# Altium PCB AB32VG1_Prougen_Circuit_V02.PcbDoc (part 1 of 3)
Units mm, origin at the board's own origin, x right, y up, seen from the top; angles counter-clockwise.
Board outline 90.13 x 60.13 mm, 4 copper layers (Top Layer, GND, POWER, Bottom Layer); 102 components, 91 nets, 357 pads, 386 vias.
Unrouted connection lines stored in the file: 1.
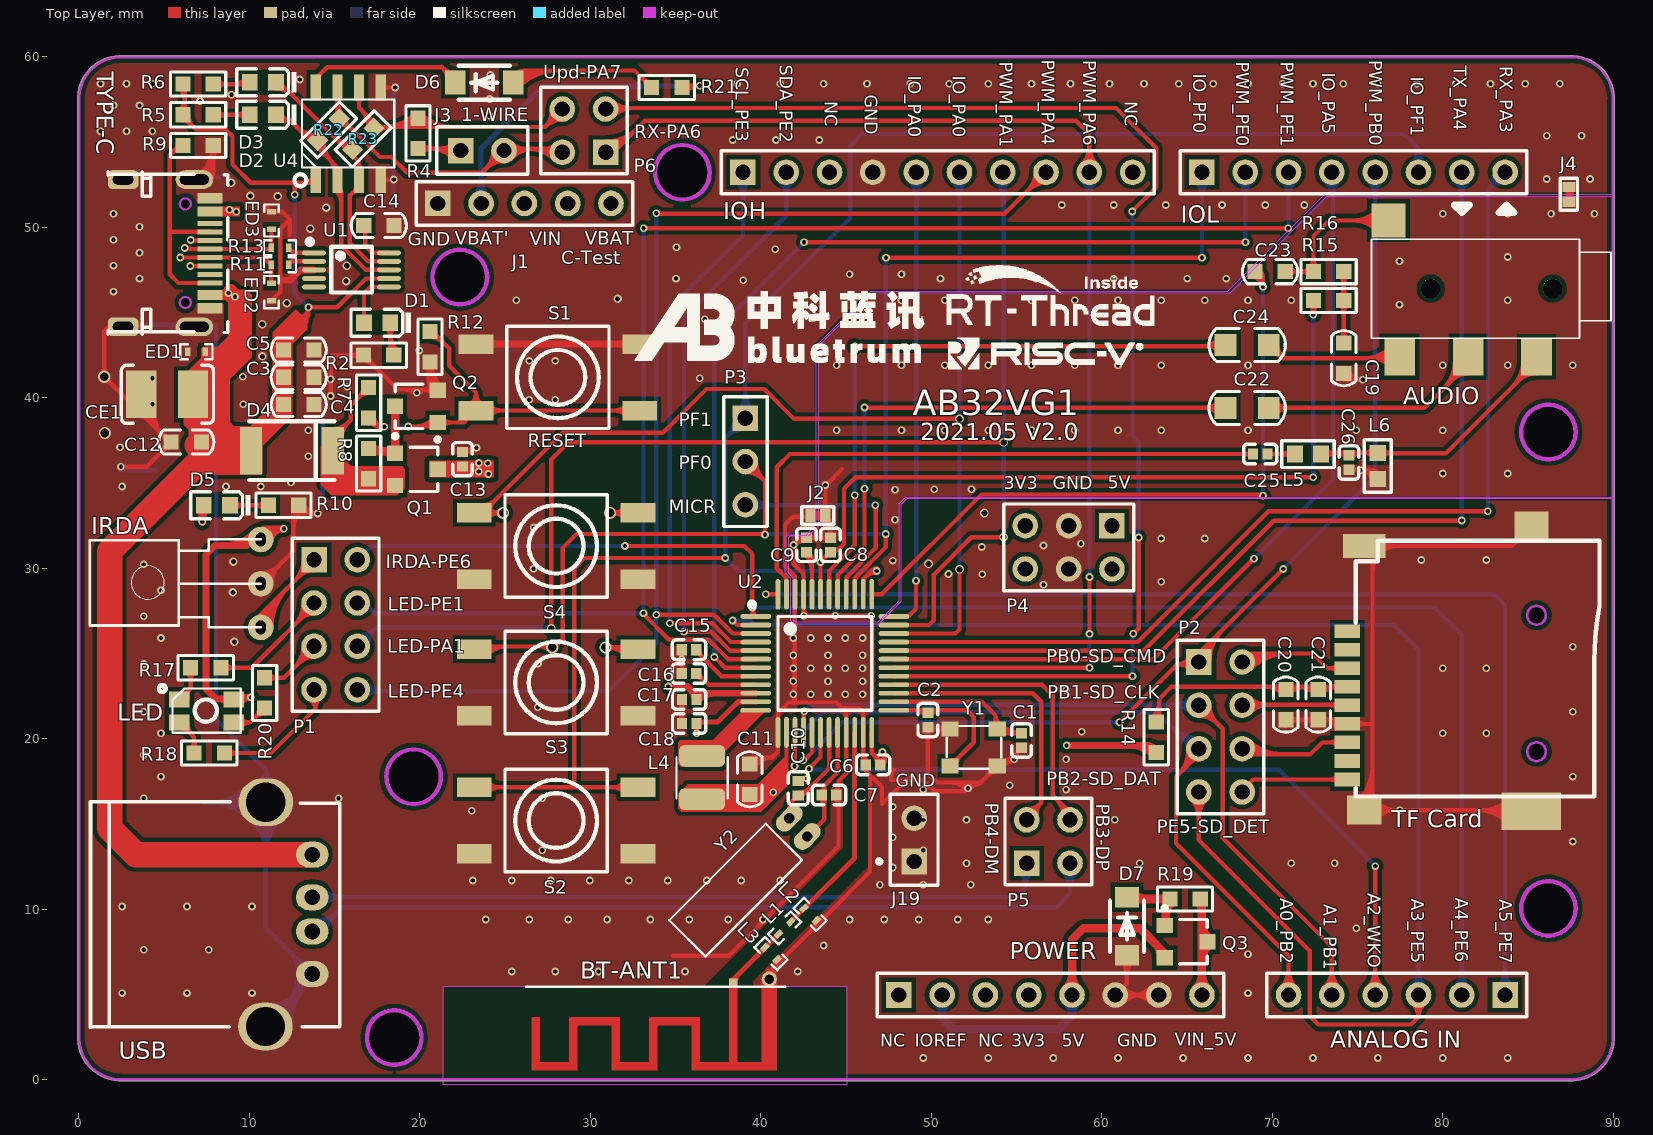
[diagram p0: Top Layer view]
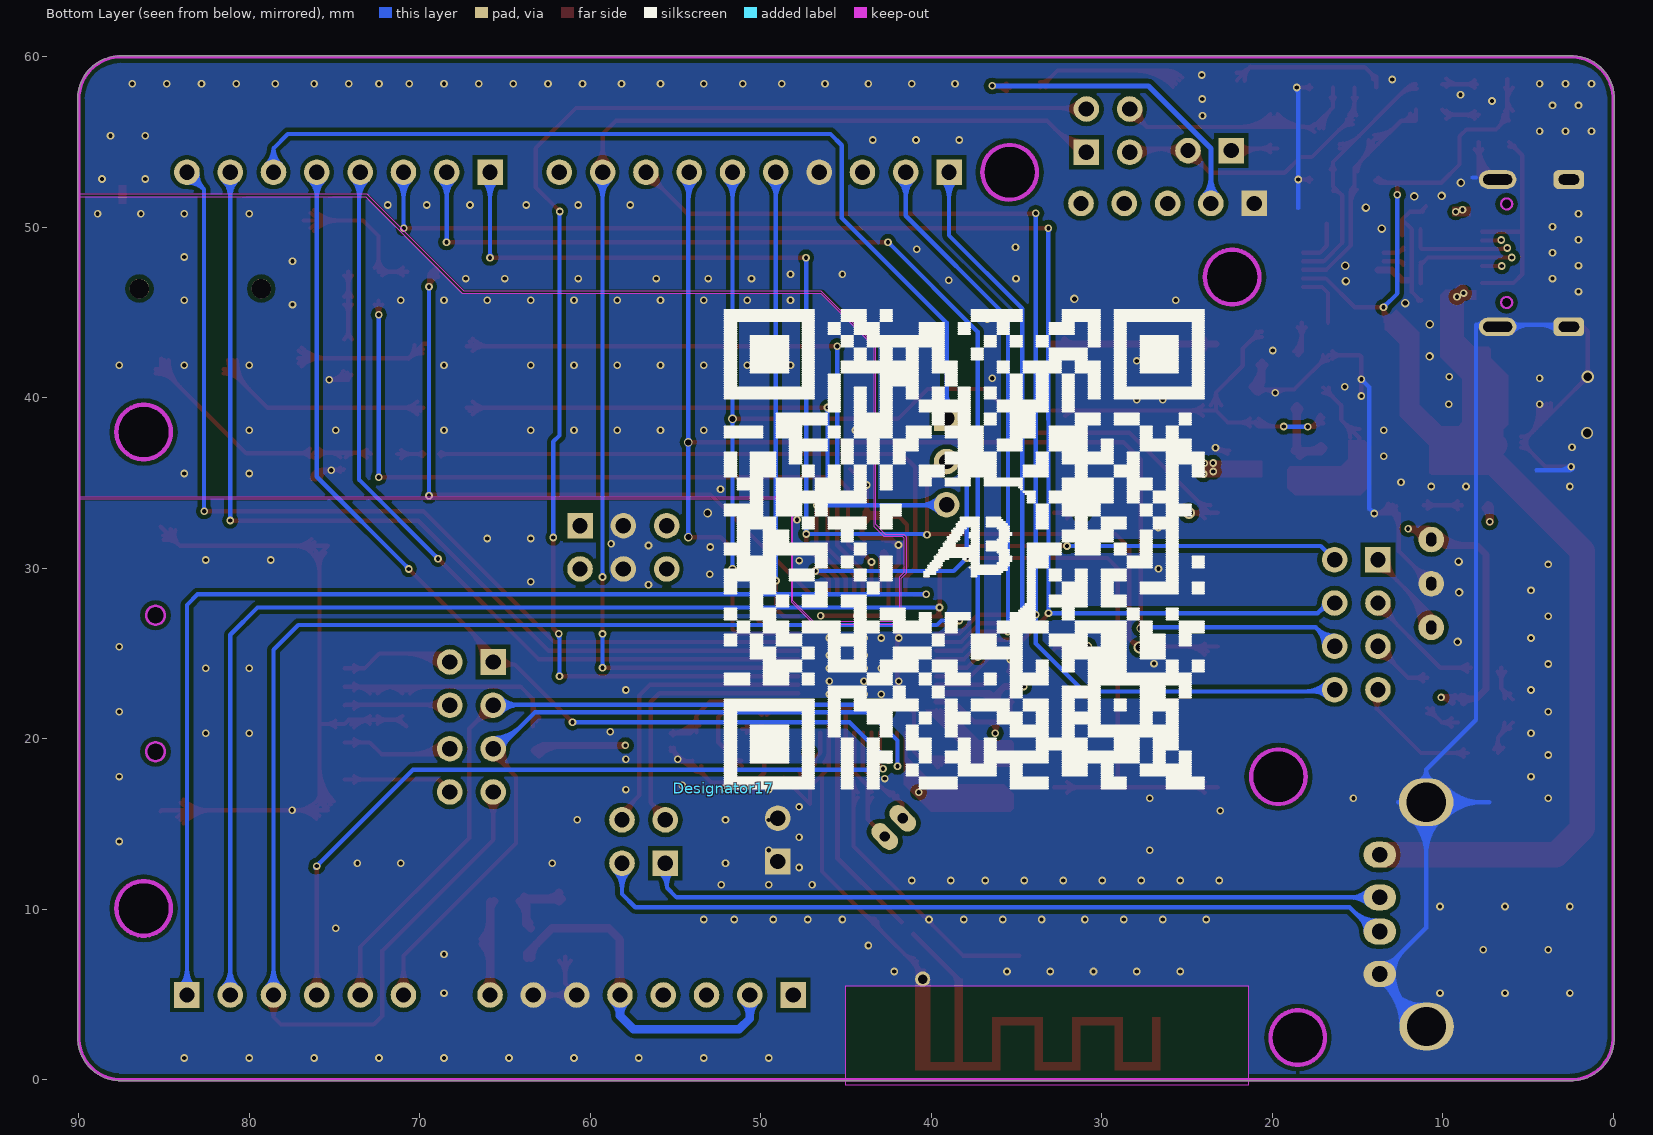
[diagram p1: Bottom Layer view, seen from below]
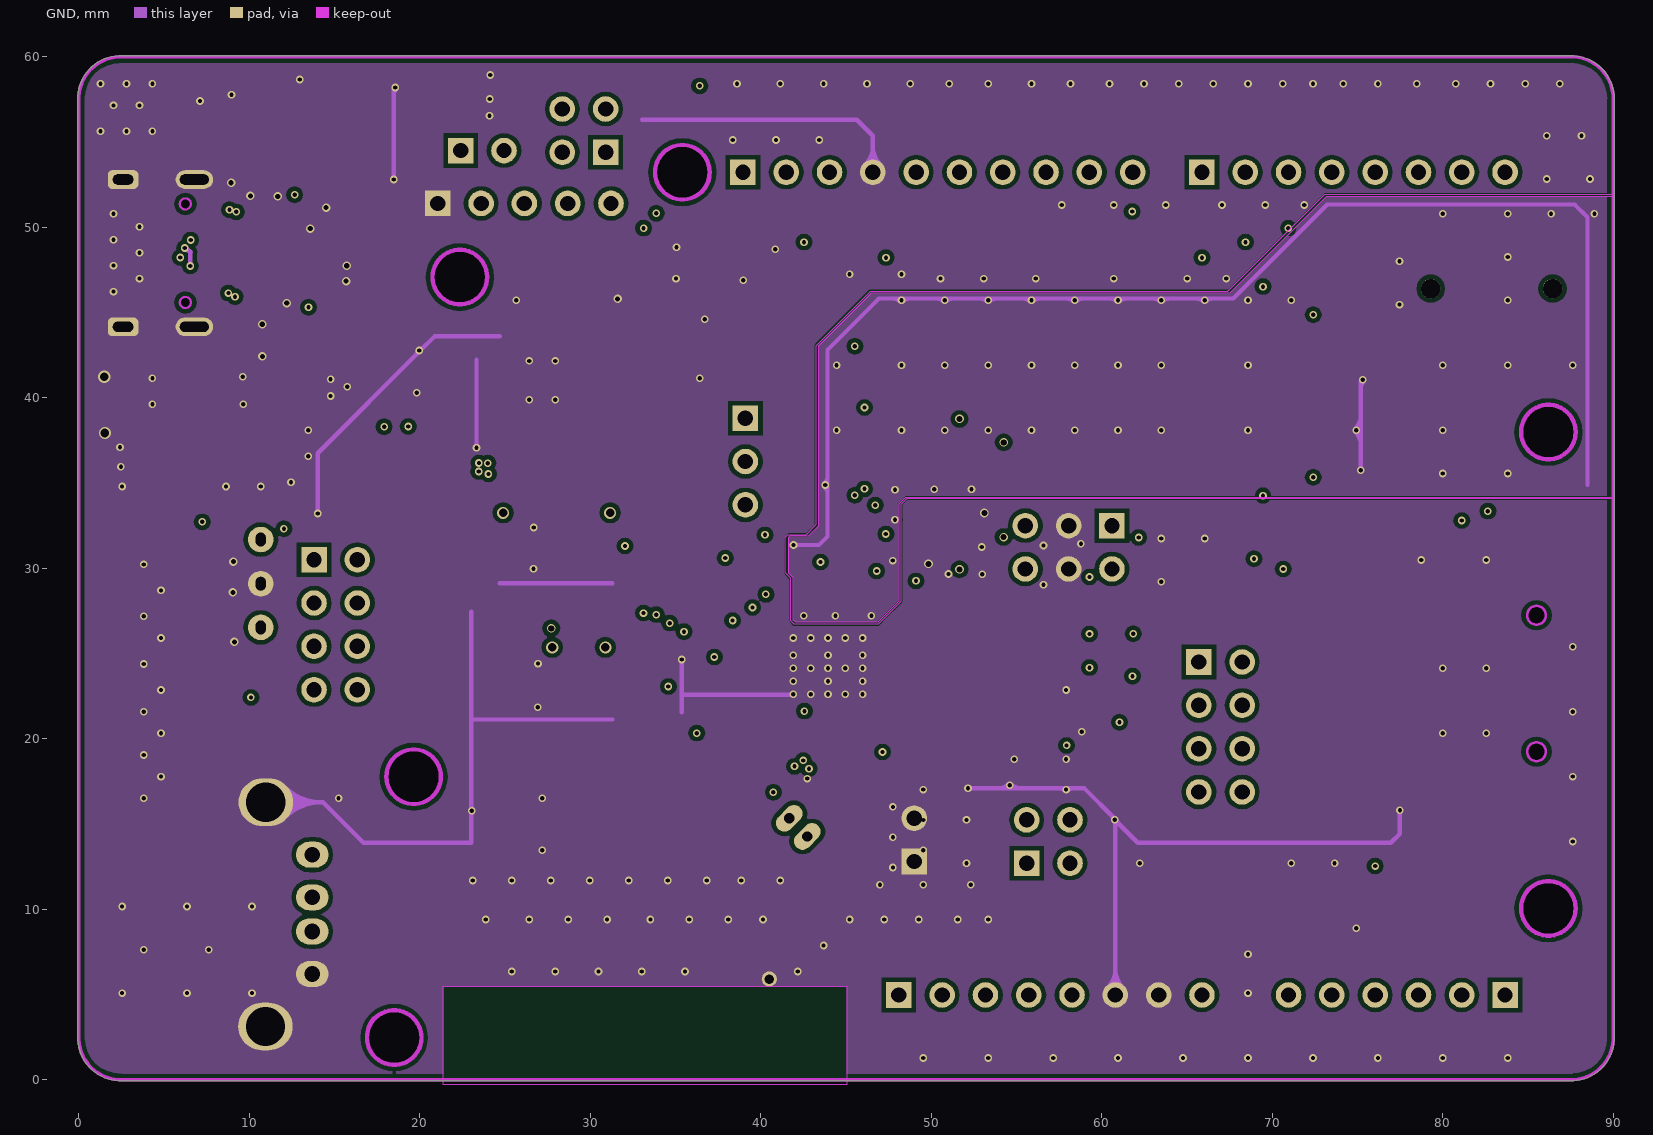
[diagram p2: GND]
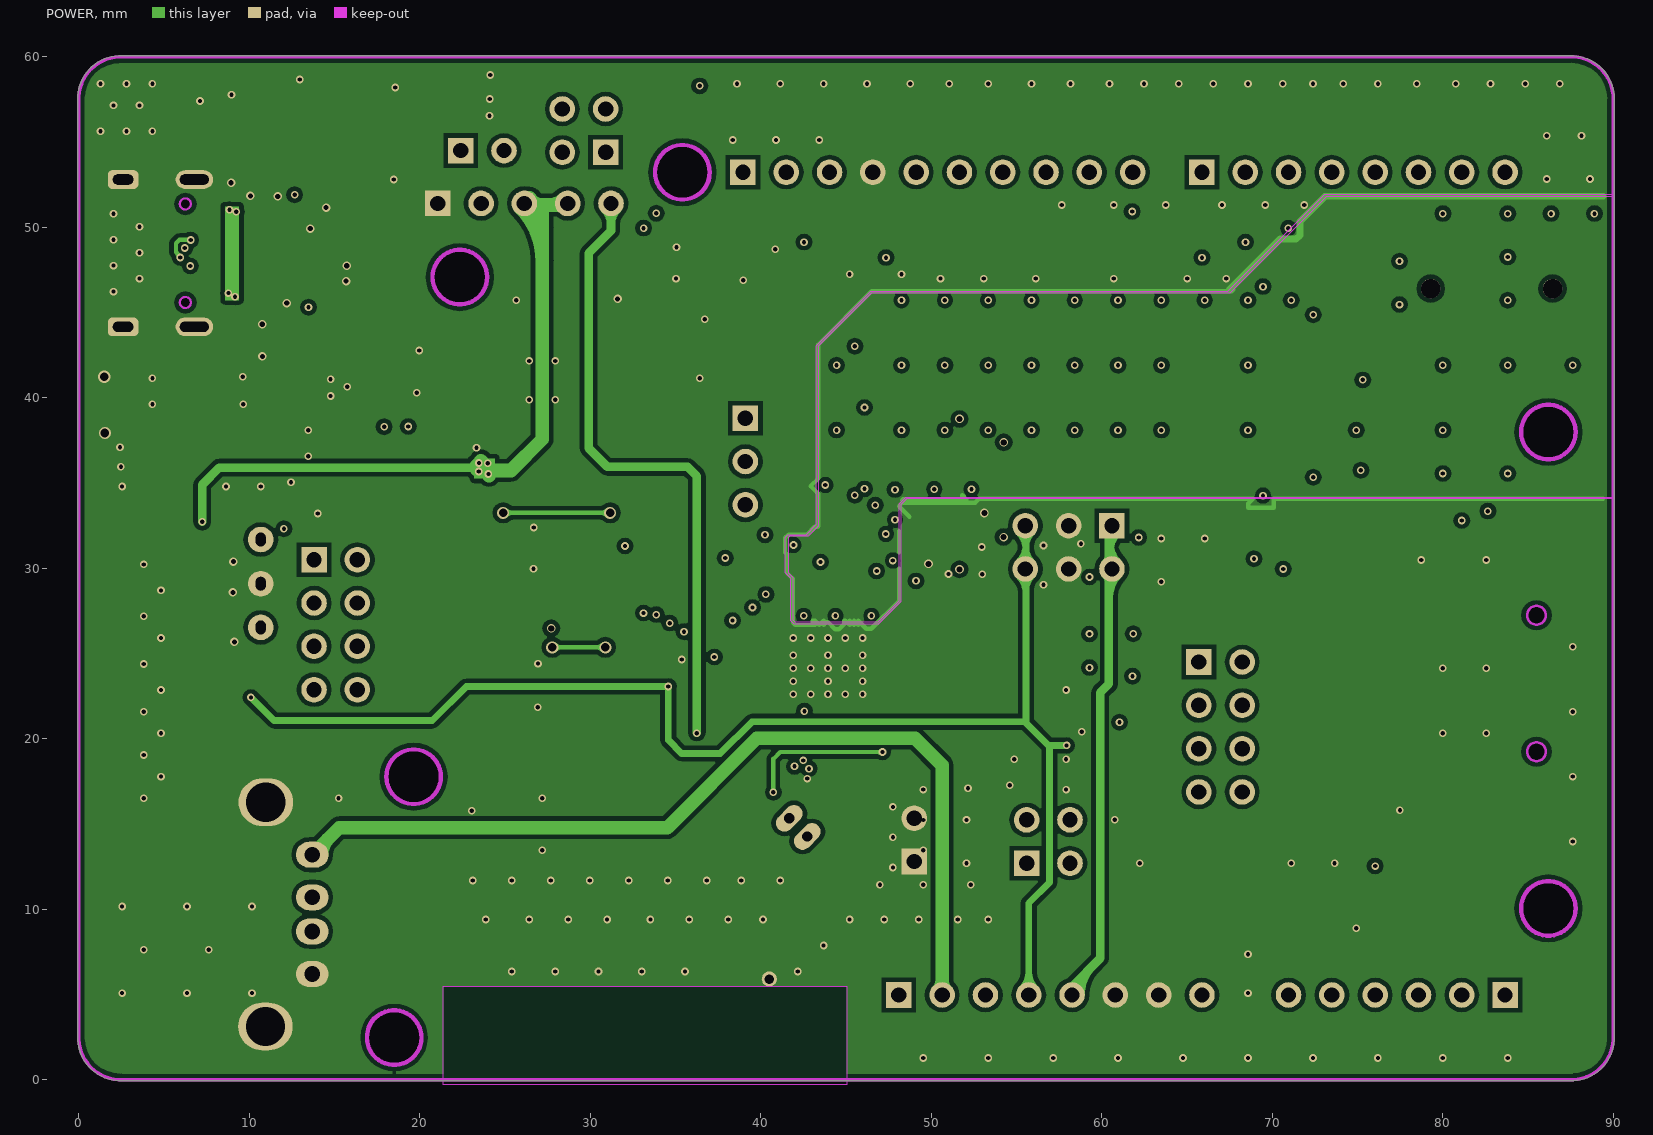
[diagram p3: POWER]

## Layer stack, top to bottom
Top Layer: signal copper 0.0356
Dielectric: core 0.32, FR-4, Dk 4.8
GND: signal copper 0.0356
Dielectric: prepreg 0.32, FR-4, Dk 4.8
POWER: signal copper 0.0356
Dielectric: core 0.32, FR-4, Dk 4.8
Bottom Layer: signal copper 0.0356

## Board outline
-0.064,2.357 cw(c0,2.36) -0.064,2.36 -0.064,57.668 cw(c0,57.668) -0.064,57.672 cw(c2.464,57.536) 2.356,60.064 cw(c2.359,60.001) 2.368,60.064 cw(c2.37,60) 2.37,60.064 87.429,60.064 cw(c87.535,57.535) 90.066,57.535 cw(c87.535,57.535) 90.066,57.499 cw(c90.002,57.5) 90.064,57.484 90.064,2.36 cw(c90,2.36) 90.064,2.355 cw(c90,2.349) 90.064,2.349 cw(c90,2.349) 90.064,2.346 cw(c87.536,2.464) 87.663,-0.064 cw(c87.66,0) 87.66,-0.064 2.571,-0.064 cw(c2.465,2.465)
cut-out: 5.923,45.586 cw(c6.244,45.586) 6.244,45.907 6.246,45.907 cw(c6.246,45.581) 6.572,45.581 6.572,45.58 cw(c6.244,45.58) 6.244,45.252 cw(c6.244,45.573) 5.923,45.573
cut-out: 5.926,51.375 cw(c6.247,51.375) 6.247,51.696 6.249,51.696 cw(c6.249,51.37) 6.575,51.37 6.575,51.369 cw(c6.247,51.369) 6.247,51.041 cw(c6.247,51.362) 5.926,51.362
cut-out: 84.947,19.245 cw(c85.495,19.245) 85.495,19.793 85.504,19.793 cw(c85.504,19.25) 86.047,19.25 86.047,19.235 cw(c85.499,19.235) 85.499,18.687 cw(c85.499,19.239) 84.947,19.239
cut-out: 84.95,27.241 cw(c85.498,27.241) 85.498,27.789 85.507,27.789 cw(c85.507,27.246) 86.05,27.246 86.05,27.231 cw(c85.502,27.231) 85.502,26.683 cw(c85.502,27.235) 84.95,27.235
cut-out: 21.253,17.721 cw(c19.653,17.721) 19.653,16.121 cw(c19.653,17.772) 18.002,17.772 18.002,17.899 cw(c19.526,17.899) 19.526,19.423 19.653,19.423 cw(c19.653,17.823) 21.253,17.823
cut-out: 87.8,37.939 cw(c86.2,37.939) 86.2,36.339 cw(c86.2,37.99) 84.549,37.99 84.549,38.117 cw(c86.073,38.117) 86.073,39.641 86.2,39.641 cw(c86.2,38.041) 87.8,38.041
cut-out: 87.8,9.999 cw(c86.2,9.999) 86.2,8.399 cw(c86.2,10.05) 84.549,10.05 84.549,10.177 cw(c86.073,10.177) 86.073,11.701 86.2,11.701 cw(c86.2,10.101) 87.8,10.101
cut-out: 37.08,53.139 cw(c35.48,53.139) 35.48,51.539 cw(c35.48,53.19) 33.829,53.19 33.829,53.317 cw(c35.353,53.317) 35.353,54.841 35.48,54.841 cw(c35.48,53.241) 37.08,53.241
cut-out: 24.02,47.019 cw(c22.42,47.019) 22.42,45.419 cw(c22.42,47.07) 20.769,47.07 20.769,47.197 cw(c22.293,47.197) 22.293,48.721 22.42,48.721 cw(c22.42,47.121) 24.02,47.121
cut-out: 20.09,2.429 cw(c18.49,2.429) 18.49,0.829 cw(c18.49,2.48) 16.839,2.48 16.839,2.607 cw(c18.363,2.607) 18.363,4.131 18.49,4.131 cw(c18.49,2.531) 20.09,2.531

## Design rules (kind name [scope] priority, off if disabled: settings)
Clearance Clearance_1 [All vs InPolygon] p1: gap=0.254
Clearance [All] p2: gap=0.127
PolygonConnect [All] p1: connectstyle=Direct reliefconductorwidth=0.254 reliefentries=4 polygonreliefangle="90 Angle"
RoutingVias [All] p1: holewidth=0.711 width=1.27 viastyle="Through Hole" minholewidth=0.711 minwidth=1.27 maxholewidth=0.711 maxwidth=1.27
SilkscreenOverComponentPads [All] p1: minsilkscreentomaskgap=0.254
SolderMaskExpansion [All] p1: expansion=0.102
Width [All] p1: maxlimit=2 minlimit=0.127 preferedwidth=0.254
27 further rules are at their usual default settings.

## Components (designator, comment, footprint, x,y, rotation, side; value= is the part's Value field where it differs from the comment)
"ANALOG IN" "Header 6" HDR1X6 83.66,4.97 r180 top
AUDIO "LINE-OUT" LINER_09 85.5,42.4 r0 top (schematic designator J13)
BT-ANT1 "ANTENNA_MIFA" TI_MIFA 38.4,5.7 r180 top
C1 "NC" C0402 55.3,19.9 r90 top
C2 "NC" C0402 49.8,21.1 r90 top
C3 "106" C0603 12.9,41.2 r0 top
C4 "106" C0603 12.9,39.6 r0 top
C5 "104" C0603 12.9,42.8 r0 top
C6 "105" C0402 46.59,18.47 r0 top
C7 "NC" C0402 44,16.7 r0 top
C8 "105" C0402 44.09,31.37 r90 top
C9 "105" C0402 42.69,31.37 r90 top
C10 "NC" C0402 42.2,17.1 r90 top
C11 "10uF" C0603 39.36,17.62 r270 top
C12 "104" C0603 6.3,37.4 r180 top
C13 "105" C0402 22.5,36.4 r90 top
C14 "104" C0603 17.6,50.1 r0 top
C15 "105" C0402 35.79,25.22 r180 top
C16 "105" C0402 35.79,23.82 r180 top
C17 "105" C0402 35.8,22.3 r180 top
C18 "105" C0402 35.8,20.9 r180 top
C19 "10uF" C0603 74.2,42.32 r90 top
C20 "10uF" C0603 70.8,22 r90 top
C21 "104" C0603 72.7,22 r90 top
C22 "22uF/10V" C0805 68.53,39.4 r0 top
C23 "104" C0603 69.875,47.4 r0 top
C24 "22uF/10V" C0805 68.53,43.1 r0 top
C25 "102" C0402 69.3,36.7 r0 top
C26 "NC" C0402 74.5,36.2 r270 top
CE1 "D47uF/16V" C1210 6.7,40.2 r180 top
D1 "RED" 0603_LED_S1 17.5,44.4 r180 top
D2 "BLUE" 0603_LED_S1 10.8,56.6 r180 top
D3 "BLUE" 0603_LED_S1 10.8,58.5 r180 top
D4 "M7" DO-213AB 12.5,36.9 r180 top
D5 "RED" 0603_LED_S1 8.1,33.7 r180 top
D6 "4148" SOD123 23.9,58.5 r0 top
D7 "5.1V" SOD123 61.5,8.89 r270 top
Designator17 "Comment" 二维码 52.16,17.09 r180 bottom
ED1 "NC" r0402 6.9,42.7 r180 top
ED2 "NC" r0402 11.3,46.2 r270 top
ED3 "NC" r0402 11.3,50.4 r90 top
IOH "Header 10" HDR1X10 38.956,53.23 r0 top
IOL "Header 8" HDR1X8 65.88,53.23 r0 top
IRDA "IR" IC_REM_DIP 10.673,26.532 r90 top (schematic designator IR1)
J1 "UART" HDR1X5 21.057,51.4 r0 top
J2 "JUMP" JUMP 43.78,33.1 r180 top
J3 "JUMP" PIN2 22.4,54.5 r0 top
J4 "JUMP" JUMP 87.4,51.5 r90 top
J19 "JUMP" PIN2 49,12.8 r90 top
L1 "NC" L0402 41.4,8.9 r225 top
L2 "NC" R0402 42.9,9.7 r135 top
L3 "NC" R0402 40.6,7.4 r315 top
L4 "10uH" CD32 36.56,17.72 r270 top
L5 "220nH" L0603 72.1,36.7 r0 top
L6 "100nH" L0603 76.2,36 r270 top
LED "LED-3528-美华" LED-3528-美华 9.1,20.95 r180 top (schematic designator LED1)
P1 "Header 4X2" HDR2X4 13.8,30.5 r270 top
P2 "Header 4X2" HDR2X4 65.7,24.5 r270 top
P3 "Header 3" HDR1X3 39.1,38.8 r270 top
P4 "Header 3X2" HDR2X3 60.6,32.5 r180 top
P5 "Header 2X2" HDR2X2 55.6,12.7 r0 top
P6 "Header 2X2" HDR2X2 30.9,54.4 r90 top
POWER "Header 8" HDR1X8 48.1,4.97 r0 top
Q1 "ATS03" SOT-23 19.8,35.8 r270 top
Q2 "SS8050" SOT-23 19.8,39.5 r90 top
Q3 "SS8050" SOT-23 64.95,8.1 r270 top
R2 "6.8K" R0603 16.7,42.5 r0 top
R4 "200R" R0603 19.9,56.4 r270 top
R5 "3K" R0603 7.89,56.6 r180 top
R6 "3K" R0603 7.89,58.4 r180 top
R7 "1K" R0603 17,40.6 r270 top
R8 "470K" R0603 17,35.25 r90 top
R9 "5.1K" R0603 7.89,54.8 r180 top
R10 "6.8K" R0603 12.9,33.7 r180 top
R11 "0ohm" r0402 11.8,47.8 r0 top
R12 "10K" R0603 20.6,42.1 r90 top
R13 "0ohm" r0402 11.8,48.8 r0 top
R14 "0R" R0603 63.2,19.2 r90 top
R15 "2.2K" R0603 74.2,45.7 r180 top
R16 "2.2K" R0603 74.2,47.4 r180 top
R17 "470R" R0603 8.34,24.16 r180 top
R18 "240R" R0603 8.54,19.16 r180 top
R19 "1K" R0603 64,10.6 r0 top
R20 "240R" R0603 10.9,23.578 r270 top
R21 "0ohm" R0603 33.6,58.2 r0 top
R22 "200R" R0603 14.02,55.096 r45 top (schematic designator R4)
R23 "200R" R0603 16.055,54.561 r45 top (schematic designator R4)
S1 "RESET" SMT_6*6*5按键 28.1,41.2 r0 top
S2 "KEY1" SMT_6*6*5按键 28,15.2 r0 top
S3 "KEY2" SMT_6*6*5按键 28,23.3 r0 top
S4 "KEY3" SMT_6*6*5按键 28,31.3 r0 top
"TF Card" "TF3" TF3 74.4,26.3 r90 top (schematic designator SD-1)
TYPE-C "USB_TYPEC_母座" TYPE-C-DIP 2.6,48.48 r270 top
U1 "CH340E" MSOP-10 16,47.5 r270 top
U2 "AB32VG1" LQFP-48_7x7x05P 43.76,24.42 r270 top
U4 "PAI121M31" PAI121M31 13.9,52.8 r90 top
USB "USB-A-M" USB-A 13.7,13.2 r0 top (schematic designator J14)
Y1 "26MHz" "XTAL_SMT - 3225" 52.5,19.5 r180 top
Y2 "32.768K" XTAL-3X8 42.2,14.8 r225 top
? "Comment" LOGO-RISC-V-2 51,41.7 r0 top
? "Comment" LOGO-RT-THREAD-4 50.9,44.3 r0 top
? "Comment" LOGO-18*6 32.6,42.2 r0 top

## Footprints (in the part's own frame and the unit in brackets; to place one, negate y for a bottom-side part, rotate by r counter-clockwise, add the part's x,y. Pads: shape width x height; smd on the part's side, far side on the other; paste and mask are expansions set on the pad)
0603_LED_S1 [mm]
  rect 0.93x0.98 smd: A(0.77,0) K(-0.77,0)
  silkscreen extent -1.98,-0.79 1.54,0.79, body extent -0.8,-0.4 0.8,0.4, height 0.6
C0402 [mm]
  rect 0.6x0.65 smd mask+0.051: 1(-0.425,0) 2(0.425,0)
  silkscreen extent -0.98,-0.58 0.98,0.58, body extent -0.48,-0.3 0.52,0.3, height 0.2
C0603 [mil]
  rect 35x35 smd: 1(-35,0) 2(35,0)
  silkscreen extent -64,-28 64,28
C0805 [mm]
  rect 1.27x1.27 smd: 1(-1.27,0) 2(1.27,0)
  silkscreen extent -2.24,-0.97 2.24,0.97
C1210 [mil]
  rect 70x110 smd: 1(0,0) 2(119.48,0)
  silkscreen extent -47,-67 165,67
CD32 [mm]
  rrect50% 1.27x2.7 smd: 1(-1.27,0) 2(1.27,0)
  silkscreen extent -1.2,-1.5 1.2,1.5
DO-213AB [mm]
  rect 1.3x2.8 smd: 1(2.4,0) 2(-2.4,0)
  silkscreen extent -2.5,-1.72 2.5,1.72
HDR1X3 [mm] "Connector; Header; 3 Position"
  rect 1.5x1.5 hole 0.9: 1(0,0)
  round 1.5 hole 0.9: 2(2.54,0) 3(5.08,0)
  silkscreen extent -1.27,-1.27 6.35,1.27
HDR1X5 [mm] "Connector; Header; 5 Position"
  rect 1.5x1.5 hole 0.9: 1(0,0)
  round 1.5 hole 0.9: 2(2.54,0) 3(5.08,0) 4(7.62,0) 5(10.16,0)
  silkscreen extent -1.27,-1.27 11.43,1.27
HDR1X6 [mm] "Connector; Header; 6 Position"
  rect 1.5x1.5 hole 0.9: 1(0,0)
  round 1.5 hole 0.9: 2(2.54,0) 3(5.08,0) 4(7.62,0) 5(10.16,0) 6(12.7,0)
  silkscreen extent -1.27,-1.27 13.97,1.27
HDR1X8 [mm] "Connector; Header; 8 Position"
  rect 1.5x1.5 hole 0.9: 1(0,0)
  round 1.5 hole 0.9: 2(2.54,0) 3(5.08,0) 4(7.62,0) 5(10.16,0) 6(12.7,0) 7(15.24,0) 8(17.78,0)
  silkscreen extent -1.27,-1.27 19.05,1.27
HDR1X10 [mm] "Connector; Header; 10 Position"
  rect 1.5x1.5 hole 0.9: 1(0,0)
  round 1.5 hole 0.9: 2(2.54,0) 3(5.08,0) 4(7.62,0) 5(10.16,0) 6(12.7,0) 7(15.24,0) 8(17.78,0) 9(20.32,0) 10(22.86,0)
  silkscreen extent -1.27,-1.27 24.13,1.27
HDR2X2 [mm] "Connector; Header; 2x2 Position"
  rect 1.5x1.5 hole 0.9: 1(0,0)
  round 1.5 hole 0.9: 2(0,2.54) 3(2.54,0) 4(2.54,2.54)
  silkscreen extent -1.27,-1.27 3.81,3.81
HDR2X3 [mm] "Connector; Header; 3x2 Position"
  rect 1.5x1.5 hole 0.9: 1(0,0)
  round 1.5 hole 0.9: 2(0,2.54) 3(2.54,0) 4(2.54,2.54) 5(5.08,0) 6(5.08,2.54)
  silkscreen extent -1.27,-1.27 6.35,3.81
HDR2X4 [mm] "Connector; Header; 4x2 Position"
  rect 1.5x1.5 hole 0.9: 1(0,0)
  round 1.5 hole 0.9: 2(0,2.54) 3(2.54,0) 4(2.54,2.54) 5(5.08,0) 6(5.08,2.54) 7(7.62,0) 8(7.62,2.54)
  silkscreen extent -1.27,-1.27 8.89,3.81
IC_REM_DIP [mm]
  round 1.5 hole 0.6 slot 0.8 at 0 deg: 1(0,0) 2(2.562,0) 3(5.152,0)
  silkscreen extent 0,0 5.16,10.02
JUMP [mm]
  rect 0.6x0.762 smd: 1(0,0) 2(0.86,0)
  silkscreen extent -0.51,-0.51 1.37,0.51
L0402 [mil]
  rect 20x13 smd: 1(-20,0) 2(20,0)
  silkscreen extent -37,-17 37,17, body extent -20,-10 20,10, height 10
L0603 [mm]
  rect 0.93x0.98 smd: 1(-0.77,0) 2(0.77,0)
  silkscreen extent -1.53,-0.79 1.54,0.79, body extent -0.82,-0.41 0.82,0.41, height 0.46
LED-3528-美华 [mm]
  rect 1.2x0.95 smd: 1(0,-1.35) 2(0,0) 3(3.2,0) 4(3.2,-1.35)
  silkscreen extent -0.4,-2.2 4.4,0.6
LINER_09 [mm]
  rect 1.8x2.2 smd: 1(0,0) 2(-4,0) 3(-8.025,0)
  rect 2x2 smd: 4(-8.675,8)
  round 1.143 hole 1.143: 5(-6.2,4) 6(0.95,4)
  silkscreen extent -9.68,1.1 4.37,6.9
LOGO-18*6 [mm]
  silkscreen extent 0,-0.12 16.98,4.06
LOGO-RISC-V-2 [mm]
  silkscreen extent 0,0.01 11.43,1.82
LOGO-RT-THREAD-4 [mm]
  silkscreen extent 0,-0.04 12.17,3.48
LQFP-48_7x7x05P [mm]
  oval 0.28x1.8 smd: 1(-2.75,-4.05) 2(-2.25,-4.05) 3(-1.75,-4.05) 4(-1.25,-4.05) 5(-0.75,-4.05) 6(-0.25,-4.05) 7(0.25,-4.05) 8(0.75,-4.05) 9(1.25,-4.05) 10(1.75,-4.05) 11(2.25,-4.05) 12(2.75,-4.05) 25(2.75,4.05) 26(2.25,4.05) 27(1.75,4.05) 28(1.25,4.05) 29(0.75,4.05) 30(0.25,4.05) 31(-0.25,4.05) 32(-0.75,4.05) 33(-1.25,4.05) 34(-1.75,4.05) 35(-2.25,4.05) 36(-2.75,4.05)
  oval 1.8x0.28 smd: 13(4.05,-2.75) 14(4.05,-2.25) 15(4.05,-1.75) 16(4.05,-1.25) 17(4.05,-0.75) 18(4.05,-0.25) 19(4.05,0.25) 20(4.05,0.75) 21(4.05,1.25) 22(4.05,1.75) 23(4.05,2.25) 24(4.05,2.75) 37(-4.05,2.75) 38(-4.05,2.25) 39(-4.05,1.75) 40(-4.05,1.25) 41(-4.05,0.75) 42(-4.05,0.25) 43(-4.05,-0.25) 44(-4.05,-0.75) 45(-4.05,-1.25) 46(-4.05,-1.75) 47(-4.05,-2.25) 48(-4.05,-2.75)
  silkscreen extent -3.6,-4.42 2.75,2.75
MSOP-10 [mm]
  oval 0.28x1.4 smd mask+0.051: 1(-1,-2.2) 2(-0.5,-2.2) 3(0,-2.2) 4(0.5,-2.2) 5(1,-2.2) 6(1,2.2) 7(0.5,2.2) 8(0,2.2) 9(-0.5,2.2) 10(-1,2.2)
  silkscreen extent -1.8,-2.6 1.33,1.2
PAI121M31 [mm]
  rect 1.55x0.6 smd: 1(0,0) 2(0,-1.27) 3(0,-2.54) 4(0,-3.81) 5(5.4,-3.81) 6(5.4,-2.54) 7(5.4,-1.27) 8(5.4,0)
  silkscreen extent -0.39,-4.6 4.7,1.25
PIN2 [mm] "Photosensitive Diode; 2 Leads"
  rect 1.5x1.5 hole 0.9: 1(0,0)
  round 1.5 hole 0.9: 2(2.54,0)
  silkscreen extent -1.4,-1.4 3.94,1.4
r0402 [mil]
  rect 13x20 smd: 1(-20,0) 2(20,0)
  silkscreen extent -37,-17 37,17
R0402 [mil]
  rect 13x20 smd: 1(-20,0) 2(20,0)
  silkscreen extent -37,-17 37,17
R0603 [mil]
  rect 35x35 smd: 1(0,0) 2(70,0)
  silkscreen extent -29,-28 99,28
SMT_6*6*5按键 [mil]
  rect 80x45 smd: 1(-188.97,76.78) 1(188.97,76.78) 2(-188.97,-76.78) 2(188.97,-76.78)
  silkscreen extent -118,-118 118,118
SOD123 [mm]
  rect 1.2x1.4 smd: 1(-1.815,-0.016) 2(1.585,-0.016)
  silkscreen extent -1.62,-1.02 1.38,0.98
SOT-23 [mm] "SOT-23; 3 Leads; Body 3.0 x 2.6 mm, inc. leads (LxW max)"
  rect 0.9x0.95 smd: 1(-0.95,-1.25) 2(0.95,-1.25) 3(0,1.25)
  silkscreen extent -2.07,-1.37 1.3,1.25
TF3 [mm]
  rect 0.8x1.5 smd: 1(0,0) 2(-1.086,0) 3(-2.172,0) 4(-3.258,0) 5(-4.344,0) 6(-5.43,0) 7(-6.516,0) 8(-7.602,0) 9(-8.688,0)
  rect 2.2x3.5 smd: 10(-10.559,-10.8)
  rect 1.7x2 smd: 10(-10.488,-1)
  rect 1.4x2.5 smd: 10(5.012,-1)
  rect 1.8x2 smd: 10(6.141,-10.8)
  Keep-Out Layer lines w0.15: -7.059,-10.55 ccw(c-7.059,-11.1) -7.059,-11.65 ccw(c-7.059,-11.1) -7.059,-10.55 ; 0.941,-10.55 ccw(c0.941,-11.1) 0.941,-11.65 ccw(c0.941,-11.1) 0.941,-10.55
  silkscreen extent -9.69,-14.8 5.31,-0.5
TI_MIFA [mm]
  rect 0.5x0.5 smd: 1(0,0)
  round 0.889 hole 0.559: 2(-2.101,-0.205)
  Top Layer region: -2.551,4.65 2.449,4.65 2.449,5.15 -2.551,5.15
  Top Layer region: 1.95,2.01 2.45,2.01 2.45,4.65 1.95,4.65
  Top Layer region: 2.45,2.01 4.45,2.01 4.45,2.51 2.45,2.51
  Top Layer region: 4.95,4.65 4.45,4.65 4.45,2.01 4.95,2.01
  Top Layer region: 4.449,4.65 7.149,4.65 7.149,5.15 4.449,5.15
  Top Layer region: 7.15,4.65 6.65,4.65 6.65,2.01 7.15,2.01
  Top Layer region: 7.15,2.01 9.15,2.01 9.15,2.51 7.15,2.51
  Top Layer region: 9.65,4.65 9.15,4.65 9.15,2.01 9.65,2.01
  Top Layer region: 9.149,4.65 11.849,4.65 11.849,5.15 9.149,5.15
  Top Layer region: 11.85,4.65 11.35,4.65 11.35,2.01 11.85,2.01
  Top Layer region: -0.25,-0.25 0.25,-0.25 0.25,4.65 -0.25,4.65
  Top Layer region: -2.55,-0.25 -1.65,-0.25 -1.65,4.65 -2.55,4.65
  silkscreen extent -3.05,0.25 12.15,0.25
TYPE-C-DIP [mm]
  rect 0.3x1.45 smd: A1(-3.375,5.095) A4(-2.6,5.095) A5(-1.25,5.095) A6(-0.25,5.095) A7(0.25,5.095) A8(1.25,5.095) A9(2.6,5.095) A12(3.375,5.095) B1(3.075,5.095) B4(2.3,5.095) B5(1.75,5.095) B6(0.75,5.095) B7(-0.75,5.095) B8(-1.75,5.095) B9(-2.3,5.095) B12(-3.075,5.095)
  oval 1.1x2.2 hole 0.6 slot 1.7 at 90 deg: GND(-4.32,4.18) GND(4.32,4.18)
  rrect50% 1.1x1.8 hole 0.6 slot 1.2 at 90 deg: GND(-4.32,0) GND(4.32,0)
  Keep-Out Layer circle w0.127: c-2.89,3.65 r0.325
  Keep-Out Layer circle w0.127: c2.89,3.65 r0.325
  silkscreen extent -4.79,-0.89 4.75,6.14, body extent -4.64,-2.64 4.64,5.72, height 3.16
USB-A [mm]
  oval 1.905x1.524 hole 0.92: 1(-0.006,-0.002) 2(-0.006,-2.502) 3(-0.006,-4.502) 4(-0.006,-7.002)
  oval 3.2x2.8 hole 2.3: 5(-2.731,3.073) 6(-2.756,-10.077)
  silkscreen extent -13.01,-10.1 1.62,3.11
XTAL-3X8 [mm]
  oval 1.8x1.016 hole 0.6: 1(0,-0.75) 2(0,0.75)
  silkscreen extent 1.2,-1.5 9.2,1.5
"XTAL_SMT - 3225" [mm] "3.2 x 2.5 mm SMT Crystal, 4 pads"
  rect 1x0.9 smd: 1(-1.372,-1.073) 2(1.397,-1.073) 3(1.397,1.098) 4(-1.372,1.098)
  silkscreen extent -1.6,-1.25 1.6,1.25
二维码 [mm]
  silkscreen extent 0.04,0 28.15,28.07

## Part data
"ANALOG IN": "Header, 6-Pin"
AUDIO: library part PHONEJACK2
BT-ANT1: library part ANTENNA_PIFA
C1 C2 C3 C4 C5 C6 C7 C8 C9 C10 C11 C13 C14 C15 C16 C17 C18 C19 C20 C21 C23 C25 C26: library part CAP, "Capacitor"
C12: library part "CAP NP_Dup1", "cap,1.00uF,+/-10%,10V,X5R,C0402"
C22 C24: library part ELECTRO1, "Electrolytic Capacitor"
CE1: library part "CAP POL_Dup1"
D1 D2 D3 D5: library part LED
D4 D6: library part DIODE, "Diode"
D7: library part Zener
ED1 ED2 ED3: library part "DIODE BI_DIR TRIG", "1-Line, Bi-directional, Transient Voltage Suppressors.9pF."
IOH: "Header, 10-Pin"
IOL POWER: "Header, 8-Pin"
J1: library part CON5, "Connector"
J2 J3 J4 J19: "Connector"
L1 L2 L3 L4 L5 L6: library part INDUCTOR
P1 P2: "Header, 4-Pin, Dual row"
P3: "Header, 3-Pin"
P4: "Header, 3-Pin, Dual row"
P5 P6: "Header, 2-Pin, Dual row"
Q1: library part "MOSFET P"
Q2 Q3: library part NPN-SMD1, "NPN Transistor"
R2 R4 R5 R6 R7 R8 R9 R10 R12 R14 R15 R16 R17 R18 R19 R20 R21 R22 R23: library part RES2
R11 R13: library part RESISTOR, "通用厚膜电阻,27K,+/-1%,R0402,1/16W."
S1 S2 S3 S4: library part SW-PB
"TF Card": library part TF
USB: library part USB-A(RECEPTACLE)
Y1 Y2: library part CRYSTAL

## Via types
v1: diameter 0.45, hole 0.25, Top Layer to Bottom Layer, tented both sides, 359 vias
v2: diameter 0.5, hole 0.3, Top Layer to Bottom Layer, tented both sides, 14 vias
v3: diameter 0.508, hole 0.356, Top Layer to Bottom Layer, tented both sides, 7 vias
v4: diameter 0.711, hole 0.508, Top Layer to Bottom Layer, tented both sides, 6 vias

## Nets (pads, with @x,y where several pads share a name; then routed paths per layer and width w, separated by ;. In a path a pad name is that pad's centre, name@x,y a point inside that pad or via, vN(x,y) a via of type N, cw(c..) or ccw(c..) an arc to the next point about the centre after c; other vN are vias at no path point)
+5V: C3.1 C4.1 C5.1 C12.1 CE1.1 D4.1 ED1.1 P4.1 P4.2 POWER.2 POWER.5 Q3.2 R5.2 R6.2 TYPE-C.A4 TYPE-C.A9 TYPE-C.B4 TYPE-C.B9 U1.7 U4.1 USB.1 | length 234.1
  Top Layer w0.254: 1.81,14.74 1.53,14.46 2.792,13.198 ; R5.2@5.887,56.825 ccw(c5.08,57.632) 6.222,57.632 ; R6.2@5.887,58.175 cw(c5.08,57.368) 6.222,57.368 ; R5.2@6.112,56.283 cw(c6.112,55.772) 6.473,56.133 ; 6.222,57.101 ccw(c6.613,57.101) R5.2@6.337,56.825 ; 6.222,57.899 cw(c6.613,57.899) R6.2@6.337,58.175 ; R6.2@6.222,58.7 6.222,58.4 6.222,56.6 6.222,56.384 6.87,55.736 8.612,55.736 9.012,55.336 9.012,53.684 10.085,52.611 12.753,52.611 ; R5.2@6.43,56.6 ccw(c7.452,56.6) 6.729,55.877 ; CE1.1@6.527,39.215 cw(c6.022,37.825) C12.1@7.5,37.825 ; CE1.1@6.613,39.453 cw(c6.153,38.188) 7.5,38.188 ; CE1.1@6.7,39.692 cw(c6.285,38.55) 7.5,38.55 ; CE1.1@6.787,39.931 cw(c6.417,38.913) CE1.1@7.5,38.913 ; CE1.1@6.873,40.169 cw(c6.549,39.275) CE1.1@7.5,39.275 ; CE1.1@6.924,40.876 7.15,40.65 7.5,40.3 7.5,40.2 7.5,37.611 C12.1@7.289,37.4 ; C12.1@6.964,37.175 cw(c6.422,36.633) 7.189,36.633 cw(c7.956,36.633) 7.414,37.175 cw(c7.956,36.633) 7.956,37.4 cw(c7.956,38.167) C12.1@7.414,37.625 ; C12.1@6.964,37.625 ccw(c5.672,38.917) CE1.1@7.5,38.917 ; C12.1@7.144,37.445 ccw(c6.285,38.304) 7.5,38.304 ; 7.189,36.4 C12.1@7.189,37.4 C12.1@7.289,37.4 ; C12.1@7.239,37.35 C12.1@7.289,37.4 ; 11.26,37.96 10.15,36.85 10,36.7 9.95,36.75 9.3,37.4 C12.1@7.289,37.4 ; v1@12.591,51.979 ccw(c12.423,52.147) 12.66,52.147 ccw(c12.897,52.147) v1@12.729,51.979 ; v1(12.66,51.91) 12.66,52.518 12.753,52.611 ; 12.97,44.713 ccw(c12.87,45.31) v1(13.475,45.31) ; 13.012,44.463 ccw(c12.92,45.01) 13.475,45.01 ; 13.022,44.4 13.475,44.853 ; 13.026,52.611 ccw(c13.026,53.674) U4.1@13.778,52.922 ; 13.065,44.715 ccw(c13.13,45.198) 13.475,44.853 ; 13.337,44.443 cw(c13.82,44.508) 13.475,44.853 ; v1@13.406,45.241 cw(c13.238,45.073) 13.475,45.073 cw(c13.712,45.073) v1@13.544,45.241 ; U4.1@13.639,52.611 ccw(c13.639,53.061) U4.1@13.957,52.743 ; U4.1@13.9,52.8 13.711,52.611 12.753,52.611 ; U1.7@18.2,47 16.853,47 15.163,45.31 v1(13.475,45.31) ; 13.475,44.853 v1(13.475,45.31)
  Top Layer w0.5: POWER.5@57.906,5.324 ccw(c57.053,6.177) 58.26,6.177 ccw(c59.467,6.177) POWER.5@58.614,5.324 ; POWER.5@58.26,4.97 58.26,8.222 58.928,8.89 62.23,8.89 63.708,7.412 Q3.2@63.708,7.158 ; 63.125,7.995 cw(c62.28,7.15) Q3.2@63.475,7.15
  Top Layer w0.8: CE1.1@6.651,40.401 ccw(c6.907,42.008) 8.057,40.857 ; CE1.1@6.777,41.191 ccw(c7.211,43.923) 9.167,41.967 ; CE1.1@7.5,40.3 9.167,41.967 ; v1@8.881,46.277 cw(c8.429,45.694) 9.167,45.694 ; v1@8.898,46.263 cw(c8.248,45.613) 9.167,45.613 ; v1(9.167,45.93) 9.167,41.967
  Top Layer w1.5: C12.1@6.941,37.221 ccw(c7.657,37.737) 7.657,36.855 ; C12.1@6.973,37.184 ccw(c7.767,37.978) 7.767,36.855 ; 6.994,36.192 ccw(c5.786,37.4) C12.1@7.494,37.4 ; 7.228,36.426 ccw(c6.489,37.164) C12.1@7.478,37.498 ; 8.128,36.855 7.657,36.855 ; USB.1@13.694,13.198 3.352,13.198 1.81,14.74 1.81,31.008 7.657,36.855
  POWER w0.5: 58.615,5.827 ccw(c59.472,4.97) POWER.5@58.26,4.97 58.26,5.472 59.911,7.123 59.911,22.709 60.424,23.222 60.424,29.96 60.424,32.164 60.68,32.42 P4.1@60.8,32.54 ; POWER.5@58.76,4.97 cw(c61.179,4.97) 59.469,6.681 ; P4.2@60.246,29.606 cw(c59.818,29.178) 60.424,29.178 ; P4.2@60.246,30.314 ccw(c59.818,30.742) 60.424,30.742 ; P4.1@60.246,32.146 cw(c59.818,31.718) 60.424,31.718 ; 60.424,28.328 cw(c62.232,28.328) P4.2@60.954,29.606 ; 60.424,30.868 cw(c62.232,30.868) P4.1@60.954,32.146 ; 60.424,31.592 ccw(c62.232,31.592) P4.2@60.954,30.314
  POWER w0.8: USB.1@13.694,13.198 15.279,14.783 34.523,14.783 39.77,20.03 49.05,20.03 50.64,18.44 POWER.2@50.64,4.97 ; USB.1@14.246,13.198 cw(c15.58,13.198) 14.637,14.141 ; POWER.2@50.393,5.217 ccw(c49.795,5.815) 50.64,5.815 ccw(c51.485,5.815) POWER.2@50.887,5.217
  Bottom Layer w0.254: v1@12.591,51.841 cw(c12.423,51.673) 12.66,51.673 cw(c12.897,51.673) v1@12.729,51.841 ; v1(12.66,51.91) 12.66,46.125 v1(13.475,45.31) ; v1@13.377,45.31 ccw(c13.14,45.31) 13.308,45.477 ccw(c13.475,45.645) v1@13.475,45.408
  Bottom Layer w0.5: POWER.2@50.286,4.616 cw(c49.433,3.763) 50.64,3.763 cw(c51.847,3.763) POWER.2@50.994,4.616 ; POWER.2@50.64,4.97 50.64,3.59 51.27,2.96 57.465,2.96 58.26,3.755 POWER.5@58.26,4.97 ; POWER.5@57.906,4.616 cw(c57.053,3.763) 58.26,3.763 cw(c59.467,3.763) POWER.5@58.614,4.616
  other v1: 8.774,46.139 9.234,50.905 8.837,51.03
AGND: C8.2 C9.2 C19.1 C26.2 J2.1 J4.1 L6.2 U2.45 | length 130.1
  Top Layer w0.254: 41.91,31.099 cw(c42.181,31.099) v1@41.989,31.291 ; v1@41.92,31.458 ccw(c41.92,31.815) 42.173,31.563 ; v1@41.926,31.316 cw(c42.665,30.577) C9.2@42.665,31.622 ; 42.359,31.749 cw(c42.665,31.444) C9.2@42.665,31.876 ; 42.51,27.471 ccw(c42.781,27.471) 42.589,27.279 ccw(c42.757,27.447) 42.757,27.21 ccw(c42.757,26.973) v1@42.589,27.141 ; C9.2@42.837,31.673 cw(c43.133,31.377) 43.133,31.795 cw(c43.133,32.213) C9.2@42.837,31.917 ; J2.1@43.658,32.897 cw(c42.614,31.853) C8.2@44.09,31.853 ; J2.1@43.658,33.303 ccw(c43.338,33.623) 43.79,33.623 ; v1@43.721,34.811 cw(c43.553,34.643) 43.79,34.643 cw(c44.027,34.643) v1@43.859,34.811 ; 43.79,33.575 ccw(c44.174,33.575) J2.1@43.902,33.303 ; v1@43.79,34.978 ccw(c43.79,35.311) 44.026,35.076 ; J2.1@43.803,32.847 cw(c43.852,32.471) 44.12,32.74 ; J2.1@43.837,33.076 cw(c43.227,32.466) 44.09,32.466 ; C8.2@43.943,31.673 ccw(c43.647,31.377) 43.647,31.795 ccw(c43.647,32.213) C8.2@43.943,31.917 ; J2.1@43.953,33.019 ccw(c44.223,33.019) J2.1@44.032,32.828 ; C8.2@43.968,31.917 ccw(c43.672,32.213) 44.09,32.213 ccw(c44.508,32.213) C8.2@44.212,31.917 ; v1@44.311,27.141 ccw(c44.143,26.973) 44.143,27.21 ccw(c44.143,27.447) v1@44.311,27.279 ; v1@44.449,27.141 cw(c44.617,26.973) 44.617,27.21 cw(c44.617,27.447) v1@44.449,27.279 ; 44.769,35.819 43.81,34.86 43.79,34.84 43.79,33.1 43.79,33.07 44.09,32.77 C8.2@44.09,31.795 C9.2@42.69,31.795 42.405,31.795 41.945,31.335 41.91,31.3 41.91,30.27 42.51,29.67 U2.45@42.51,28.47 42.51,27.22 v1(42.52,27.21) v1(44.38,27.21) v1(46.49,27.21) ; v1@46.421,27.141 ccw(c46.253,26.973) 46.253,27.21 ccw(c46.253,27.447) v1@46.421,27.279 ; C19.1@74.028,41.349 ccw(c74.503,41.576) C19.1@74.503,41.05 ; C19.1@74.2,41.05 v1(75.31,41.05) cw(c75.31,41.964) C19.1@74.486,41.568 ; C19.1@74.257,41.458 ccw(c74.906,41.77) 74.906,41.05 ; C26.2@74.456,35.819 C26.2@74.5,35.775 v1@75.2,35.775 ; C26.2@74.647,35.653 cw(c74.943,35.357) 74.943,35.775 cw(c74.943,36.193) C26.2@74.647,35.897 ; 74.903,35.775 cw(c74.903,35.453) v1@75.131,35.681 ; v1@75.241,40.981 ccw(c75.073,40.813) 75.073,41.05 ccw(c75.073,41.287) v1@75.241,41.119 ; v1@75.269,35.681 cw(c75.497,35.453) 75.497,35.775 ; 75.48,35.775 cw(c75.48,35.161) L6.2@76.091,35.222 ; 75.761,35.775 cw(c75.761,35.189) L6.2@76.344,35.247 ; L6.2@75.839,35.197 ccw(c75.2,35.133) v1@75.2,35.775 ; L6.2@75.838,35.257 ccw(c75.165,35.31) 75.643,35.787 ccw(c76.172,36.317) L6.2@76.174,35.568 ; L6.2@76.2,35.23 75.655,35.775 v1@75.2,35.775
  GND w0.254: v1(41.92,31.36) 43.42,31.36 43.92,31.86 43.92,34.88 43.92,42.81 46.93,45.82 48.26,45.82 50.8,45.82 53.34,45.82 55.88,45.82 58.42,45.82 60.96,45.82 63.5,45.82 66.04,45.82 67.71,45.82 73.23,51.34 87.74,51.34 88.49,50.59 88.49,34.88 ; v1@41.989,31.291 cw(c42.157,31.123) 42.157,31.36 cw(c42.157,31.597) v1@41.989,31.429 ; v1@43.721,34.811 cw(c43.24,34.33) 43.92,34.33 ; v1@43.721,34.949 ccw(c43.24,35.43) 43.92,35.43 ; 47.782,45.82 cw(c47.782,45.242) v1@48.191,45.651 ; v1@48.329,45.651 cw(c48.738,45.242) 48.738,45.82 ; 50.322,45.82 cw(c50.322,45.242) v1@50.731,45.651 ; v1@50.869,45.651 cw(c51.278,45.242) 51.278,45.82 ; 52.862,45.82 cw(c52.862,45.242) v1@53.271,45.651 ; v1@53.409,45.651 cw(c53.818,45.242) 53.818,45.82 ; 55.402,45.82 cw(c55.402,45.242) v1@55.811,45.651 ; v1@55.949,45.651 cw(c56.358,45.242) 56.358,45.82 ; 57.942,45.82 cw(c57.942,45.242) v1@58.351,45.651 ; v1@58.489,45.651 cw(c58.898,45.242) 58.898,45.82 ; 60.482,45.82 cw(c60.482,45.242) v1@60.891,45.651 ; v1@61.029,45.651 cw(c61.438,45.242) 61.438,45.82 ; 63.022,45.82 cw(c63.022,45.242) v1@63.431,45.651 ; v1@63.569,45.651 cw(c63.978,45.242) 63.978,45.82 ; 65.562,45.82 cw(c65.562,45.242) v1@65.971,45.651 ; v1@66.109,45.651 cw(c66.518,45.242) 66.518,45.82 ; v1@74.861,38.031 cw(c74.042,37.212) 75.2,37.212 ; v1@74.861,38.169 ccw(c74.042,38.988) 75.2,38.988 ; v1@75.04,37.99 ccw(c74.655,38.375) 75.2,38.375 ; v1@75.04,38.21 cw(c74.655,37.825) 75.2,37.825 ; v1@75.131,35.819 ccw(c74.963,35.987) 75.2,35.987 ccw(c75.437,35.987) v1@75.269,35.819 ; v1(75.2,35.75) 75.2,38.1 75.2,40.94 v1(75.31,41.05) ; 75.2,40.548 cw(c75.812,40.548) v1@75.379,40.981
  other v1: 47.75,30.45 47.88,32.85 47.88,34.61 50.18,34.64 52.36,34.64 43.79,34.88 80.01,35.56 83.82,35.56 44.45,38.1 48.26,38.1 50.8,38.1 53.34,38.1 55.88,38.1 58.42,38.1 60.96,38.1 63.5,38.1 68.58,38.1 74.93,38.1 80.01,38.1 44.45,41.91 48.26,41.91 50.8,41.91 53.34,41.91 55.88,41.91 58.42,41.91 60.96,41.91 63.5,41.91 68.58,41.91 80.01,41.91 83.82,41.91 87.63,41.91 77.47,45.466 48.26,45.72 50.8,45.72 53.34,45.72 55.88,45.72 58.42,45.72 60.96,45.72 63.5,45.72 66.04,45.72 68.58,45.72 71.12,45.72 83.82,45.72 77.47,48.006 83.82,48.26 80.01,50.8 83.82,50.8 86.36,50.8 88.9,50.8
BTANT: L1.1 L2.2 U2.22 | length 12.7
  Top Layer w0.293: L1.1@41.759,9.259 42.55,10.05 45.51,13.01 U2.22@45.51,20.37
DM1: R11.2 U1.2 | length 2.1
  Top Layer w0.254: R11.2@12.308,47.8 12.508,48 ; R11.2@12.311,47.927 ccw(c12.33,48.178) 12.508,48 ; R11.2@12.335,47.862 cw(c12.668,47.529) 12.668,48 ; R11.2@12.345,47.878 cw(c12.508,47.829) 12.508,48 ; U1.2@13.475,48 12.508,48
DP1: R13.2 U1.1 | length 1.5
  Top Layer w0.254: R13.2@12.308,48.673 cw(c12.308,48.366) 12.525,48.583 ; R13.2@12.308,48.8 12.608,48.5 U1.1@13.475,48.5
FMANT: C25.1 U2.47 | length 37
  Top Layer w0.254: 41.346,29.594 cw(c40.983,29.23) U2.47@41.497,29.23 ; U2.47@41.51,28.47 41.51,29.43 40.94,30 40.94,35.93 41.71,36.7 C25.1@68.875,36.7 ; C25.1@68.753,36.578 ccw(c68.457,36.282) 68.457,36.7 ccw(c68.457,37.118) C25.1@68.753,36.822